# Altium PCB PCB1.PcbDoc
Units mil, origin at the board's own origin, x right, y up, seen from the top; angles counter-clockwise.
Board outline 2259.84 x 3259.84 mil, 2 copper layers (Top Layer, Bottom Layer); 14 components, 12 nets, 46 pads, 25 vias.
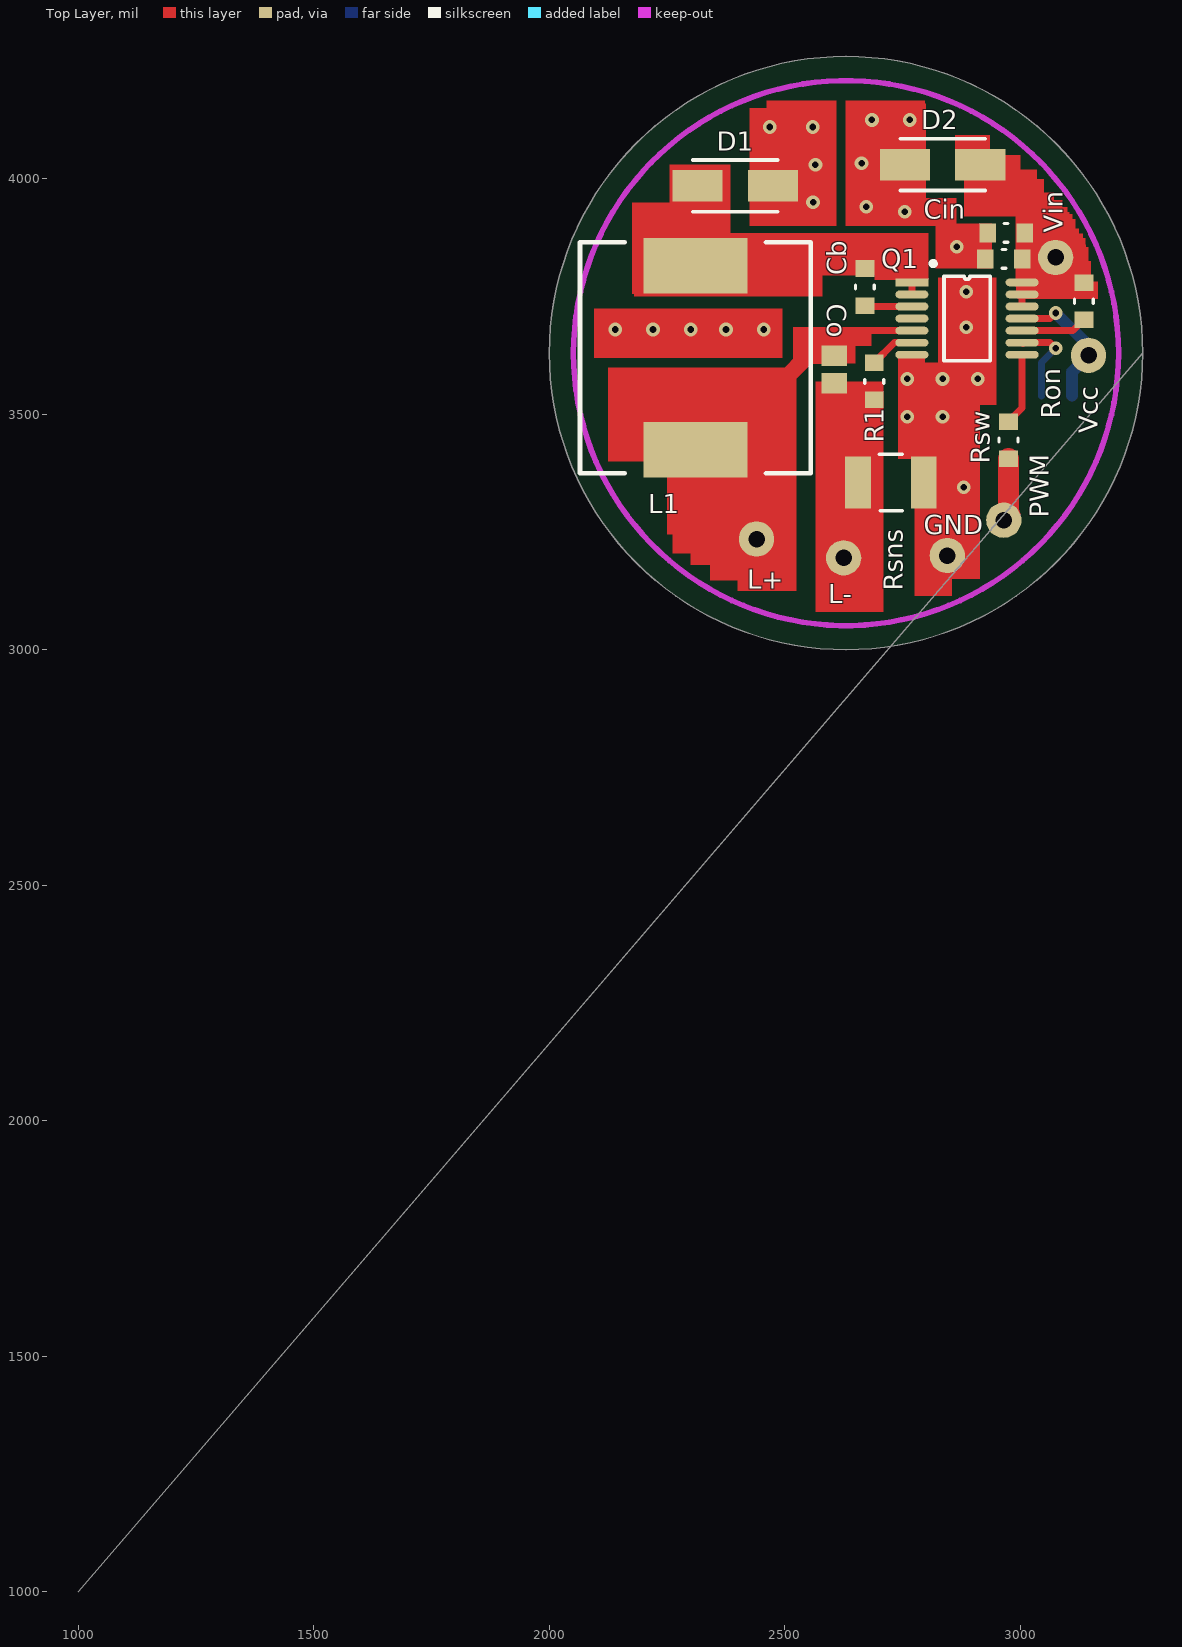
[diagram p0: Top Layer view]
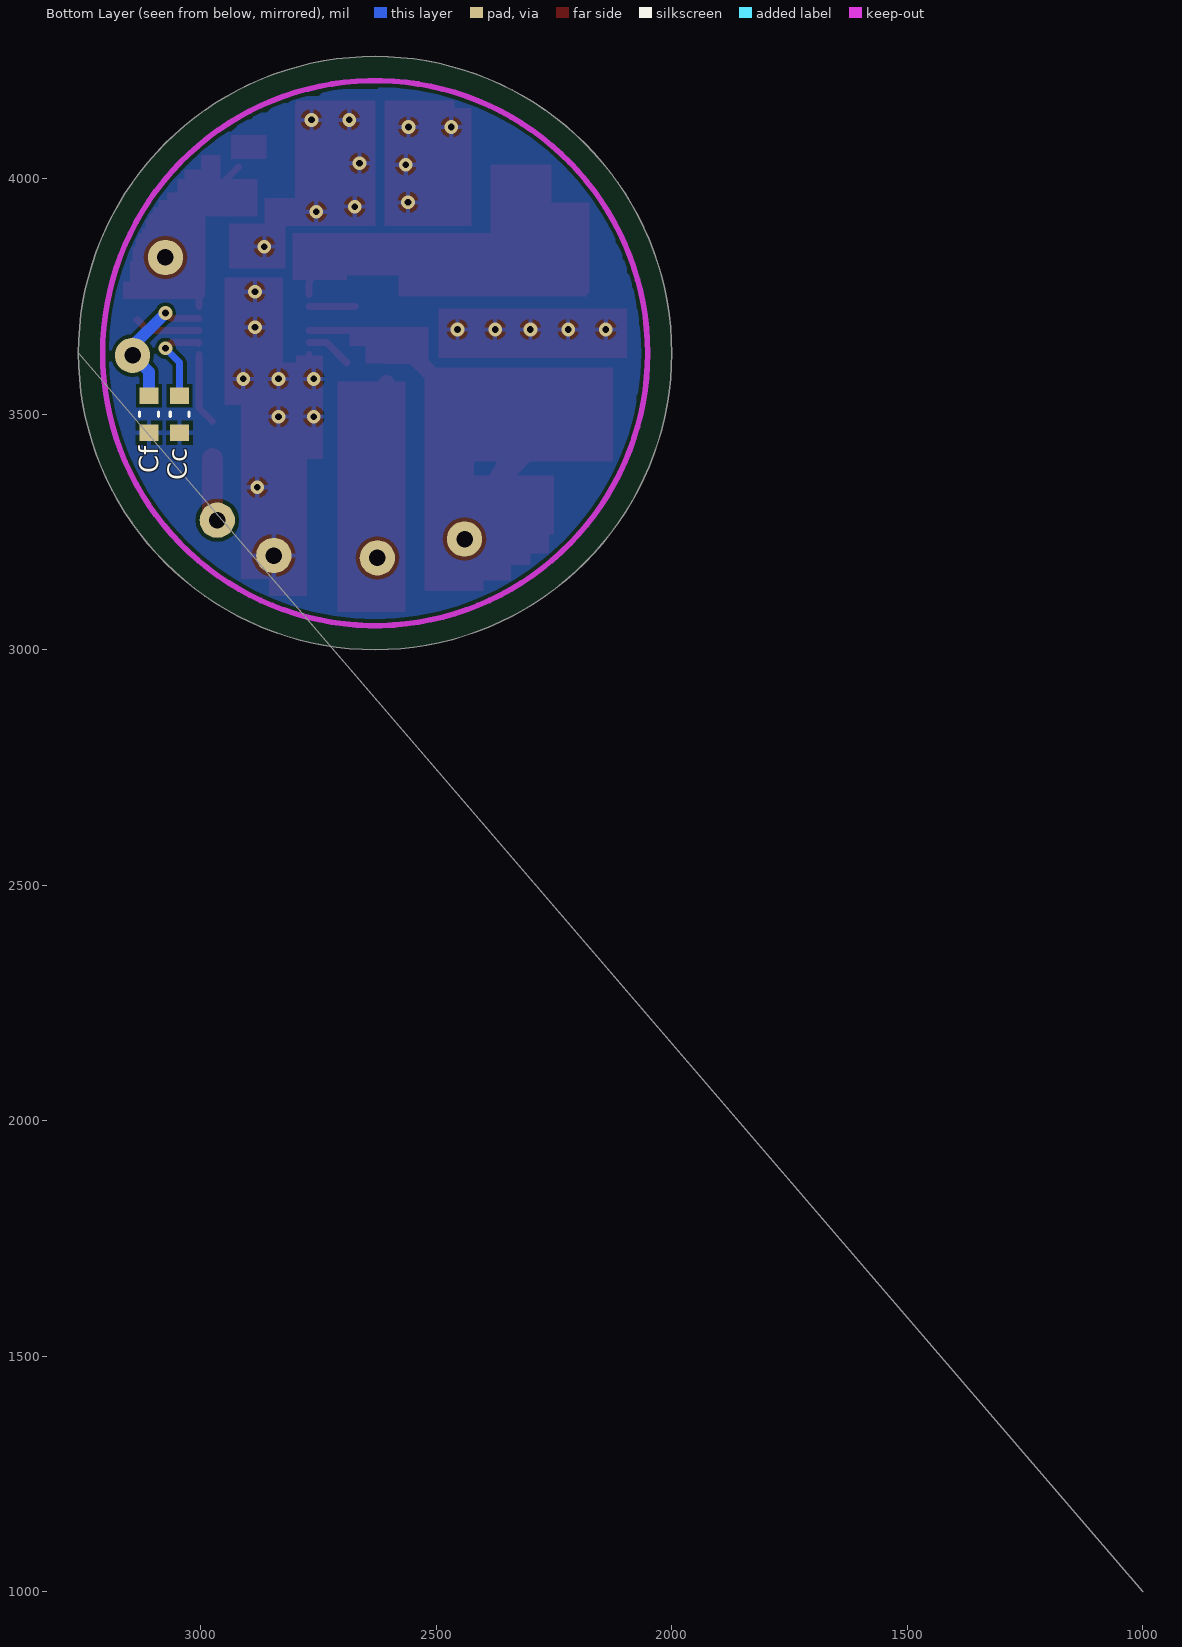
[diagram p1: Bottom Layer view, seen from below]

## Layer stack, top to bottom
Top Layer: signal copper 1.4
Dielectric: core 12.6, FR-4, Dk 4.8
Bottom Layer: signal copper 1.4

## Board outline
3259.84,3629.92 ccw(c2629.92,3629.92) 2629.92,4259.84 ccw(c2629.92,3629.92) 2000,3629.92 ccw(c2629.92,3629.92) 2629.92,3000 ccw(c2629.92,3629.92) 1000,1000

## Design rules (kind name [scope] priority, off if disabled: settings)
Clearance [All] p1: gap=8
MinimumSolderMaskSliver [All] p1: minsoldermaskwidth=4
PolygonConnect [All] p1: connectstyle=Relief reliefconductorwidth=10 reliefentries=4 polygonreliefangle="90 Angle"
RoutingVias [All] p1: holewidth=29 width=39.37 viastyle="Through Hole" minholewidth=12 minwidth=20 maxholewidth=30 maxwidth=50
SilkscreenOverComponentPads [All] p1: minsilkscreentomaskgap=10
SolderMaskExpansion [All] p1: expansion=3
Width [All] p1: maxlimit=100 minlimit=10 preferedwidth=10
26 further rules are at their usual default settings.

## Components (designator, comment, footprint, x,y, rotation, side; value= is the part's Value field where it differs from the comment)
Cb "0603" 0603 2670,3770 r90 top
Cc "0603" 0603 3045,3500 r90 bottom
Cf "0603" 0603 3110,3500 r90 bottom
Cin "0603" 0603 2965,3830 r0 top
Cin2 "0603" 0603 2970,3885 r0 top
Co "0805" C0805 2605,3595 r270 top
D1 "B1100" Diode-B1100-SMA 2395,3985 r180 top
D2 "B1100" Diode-B1100-SMA 2835,4030 r0 top
L1 "SRR1280" SRR1280-inductor 2310,3620 r180 top
Q1 "LM3406" TSSOP-14 2770,3780 r0 top
R1 "0603" 0603 2690,3570 r90 top
Ron "0603" 0603 3135,3740 r90 top
Rsns "1210" 1210 2725,3355 r180 top
Rsw "0603" 0603 2975,3445 r90 top

## Footprints (in the part's own frame and the unit in brackets; to place one, negate y for a bottom-side part, rotate by r counter-clockwise, add the part's x,y. Pads: shape width x height; smd on the part's side, far side on the other; paste and mask are expansions set on the pad)
0603 [mm]
  rect 0.9x1.02 smd: 1(-1,0) 2(1,0)
  silkscreen extent -0.1,-0.51 0.1,0.51, body extent -0.89,-0.46 0.89,0.46, height 0.9
1210 [mm]
  rect 1.4x2.8 smd: 1(-1.778,0) 2(1.778,0)
  silkscreen extent -0.64,-1.52 0.64,1.52, body extent -1.6,-1.24 1.6,1.24, height 1.3
C0805 [mm] "Chip Capacitor, Body 2.0x1.3mm, IPC High Density"
  rect 1.1x1.4 smd: 1(-0.75,0) 2(0.75,0)
  body extent -1.1,-0.72 1.1,0.72, height 1.4
Diode-B1100-SMA [mm] "100V, 1A, Schottky Package"
  rect 2.7x1.7 smd: 1(-2.032,0) 2(2.032,0)
  silkscreen extent -2.29,-1.4 2.29,1.4, body extent -2.29,-1.4 2.29,1.4, height 2.01
SRR1280-inductor [mm] "surface-mount inductor"
  rect 5.6x3 smd: 1(0,4.953) 2(0,-4.953)
  silkscreen extent -6.22,-6.22 6.22,6.22, body extent -6.22,-6.22 6.22,6.22, height 7.5
TSSOP-14 [mm] "TSSOP - 14 pin, thermal pad"
  rect 1.78x0.42 smd mask+0.05: 1(0,0)
  oval 1.78x0.42 smd mask+0.05: 2(0,-0.65) 3(0,-1.3) 4(0,-1.95) 5(0,-2.6) 6(0,-3.25) 7(0,-3.9) 8(5.94,-3.9) 9(5.94,-3.25) 10(5.94,-2.6) 11(5.94,-1.95) 12(5.94,-1.3) 13(5.94,-0.65) 14(5.94,0)
  silkscreen extent 1.02,-4.23 4.22,1.14, body extent 0.64,-4.44 5.21,0.51, height 1.1

## Part data
Cb Cc Cf Cin Cin2: library part Capacitor, "0603 capacitor"
Co: library part "Cap Pol3", "Polarized Capacitor (Surface Mount)"
D1 D2: library part "Diode - B1100"
L1: library part "Inductor - SRR1280"
Q1: "1.5A - LED Driver"
R1 Ron Rsw: library part Resistor, "0603 resistor"
Rsns: library part Resistor_1210, "1210 resistor"

## Free pads (board coordinates)
  round 75 hole 35: 0(2440,3235) 1(2625,3195) 1(2845,3200) 1(2965,3275) 1(3075,3833) 1(3145,3625)

## Via types
v1: diameter 29, hole 14, Top Layer to Bottom Layer, 25 vias

## Nets (pads, with @x,y where several pads share a name; then routed paths per layer and width w, separated by ;. In a path a pad name is that pad's centre, name@x,y a point inside that pad or via, vN(x,y) a via of type N, cw(c..) or ccw(c..) an arc to the next point about the centre after c; other vN are vias at no path point)
GND: Cc.1 Cf.1 Cin2.1 Cin.1 D1.1 D2.1 pad.1@2845,3200 Q1.7 Rsns.1 | length 31.5
  Top Layer w15: 2770,3595 Q1.7
  other v1: 2880,3345 2760,3495 2835,3495 2760,3575 2835,3575 2910,3575 2140,3680 2220,3680 2300,3680 2375,3680 2455,3680 2885,3685 2885,3760 2865,3856 2755,3930 2673,3941 2560,3950 2565,4030 2663,4033 2468,4110 2559,4110 2685,4125 2765,4125
LED+: Co.1 L1.1 pad.0 Q1.5 | length 851.8
  Top Layer w10: L1.1 2445,3425 2500,3480 2500,3575
  Top Layer w15: Co.1 2658.11,3677.64 Q1.5
  Top Layer w35: 2500,3575 2549.53,3624.53 Co.1
  Top Layer w50: L1.1 2350,3385 pad.0
LED-: Co.2 pad.1@2625,3195 R1.1 Rsns.2 | length 503
  Top Layer w35: Rsns.2 2605,3405 Co.2 2639.84,3530.63 R1.1
  Top Layer w50: pad.1@2625,3195 2625,3325 Rsns.2
NetCb_1: Cb.1 Q1.3 | length 98.2
  Top Layer w15: Cb.1@2671.81,3728.82 Q1.3
NetCb_2: Cb.2 D1.2 L1.2 Q1.1 Q1.2 | length 655.1
  Top Layer w10: D1.2@2310,3970 L1.2 2315.63,3809.37 Cb.2 2740.63,3809.37 Q1.1
  Top Layer w15: Q1.2 Q1.1
NetCc_2: Cc.2 Q1.9 | length 191.8
  Top Layer w15: Q1.9@3005.68,3650.22 Q1.9 3062.95,3652.05 v1(3075,3640)
  Bottom Layer w15: Cc.2 3045,3610 v1(3075,3640)
NetQ1_6: Q1.6 R1.2 | length 97.7
  Top Layer w15: R1.2 2732.68,3652.05 Q1.6
NetQ1_8: Q1.8 Rsw.2 | length 154
  Top Layer w15: Rsw.2 3003.86,3513.23 Q1.8
NetQ1_10: Q1.10 Ron.1 | length 140.7
  Top Layer w15: Q1.10 3112.01,3677.64 Ron.1
P_OFF_ON: pad.1@2965,3275 Rsw.1 | length 134.8
  Top Layer w45: pad.1@2975,3285 Rsw.1
  Top Layer w50: pad.1@2965,3275 pad.1@2975,3285
VCC: Cf.2 pad.1@3145,3625 Q1.11 | length 295.1
  Top Layer w15: Q1.11 3063.23,3703.23 v1(3075,3715)
  Bottom Layer w15: pad.1@3145,3625 pad.1@3145,3645
  Bottom Layer w25: v1(3075,3715) pad.1@3145,3645 ; Cf.2 3110,3590 pad.1@3145,3625
VIN: Cin2.2 Cin.2 D2.2 pad.1@3075,3833 Q1.12 Q1.13 Q1.14 Ron.2 | length 330.6
  Top Layer w15: D2.2@2920,4025 3004.37,3940.63 ; Q1.12 Q1.13
  Top Layer w25: Q1.13 Q1.14 Cin2.2@3003.86,3869.49 ; Cin2.2@3004.37,3870 3004.37,3940.63
pads on no net: Q1.4

## Polygon pours and split planes (outlines as drawn)
GND on Bottom Layer "Top Layer-No Net" (solid, pour order 20): 427 vertices, not listed, extent 2065,3060 3200,4195

## Keep-outs
Keep-Out Layer:
  circle w11.81: c2629.92,3629.92 r578.74

## Other copper
Top Layer:
  rectangle net GND: 2775,3114 2855,3150
  rectangle net LED+: 2261,3204 2304,3245
  rectangle net LED+: 2341,3147 2401,3180
  rectangle net GND: 2629,4160 2798,4166
  rectangle net GND: 2461,4150 2610,4166
  rectangle net VIN: 3133,3851 3138,3874
  rectangle net VIN: 3124,3852 3133,3884
  rectangle net VIN: 3110,3891 3117,3915
  rectangle net VIN: 3105,3892 3111,3925
  rectangle net VIN: 3100,3895 3105,3930
  rectangle net VIN: 3090,3895 3100,3940
  rectangle net VIN: 3135,3825 3145,3855
  rectangle net VIN: 3125,3815 3140,3860
  rectangle net LED+: 2400,3125 2525,3180
  rectangle net LED+: 2300,3180 2525,3245
  rectangle net LED-: 2565,3080 2710,3250
  rectangle net GND: 2740,3405 2915,3520
  rectangle net VIN: 2996,3745 3165,3782
  rectangle net GND: 2740,3594 2798,3625
  rectangle net LED+: 2639,3645 2684,3674
  rectangle net LED+: 2631,3669 2663,3685
  rectangle net LED+: 2517,3608 2650,3685
  rectangle net GND: 2793,3900 2865,3959
  rectangle net VIN: 2861,4042 2936,4093
  rectangle net VIN: 3048,3950 3072,3971
  rectangle net VIN: 3000,3990 3035,4020
  rectangle net VIN: 2958,3953 3000,4051
  rectangle net GND: 2775,3150 2915,3520
  rectangle net VIN: 2990,3870 3090,3955
  rectangle net VIN: 2990,3770 3150,3825
  rectangle net VIN: 2990,3785 3125,3895
  rectangle net GND: 2740,3520 2950,3610
  rectangle net GND: 2825,3605 2950,3790
  rectangle net VIN: 2880,3920 3050,4000
  rectangle net LED+: 2420,3245 2525,3400
  rectangle net LED+: 2250,3245 2420,3370
  rectangle net LED-: 2565,3250 2710,3305
  rectangle net LED-: 2565,3305 2710,3570
  rectangle net LED+: 2125,3400 2525,3450
  rectangle net LED+: 2125,3450 2525,3599.76
  rectangle net GND: 2095,3620 2495,3725
  rectangle net GND: 2820,3810 2940,3905
  rectangle net GND: 2575,3900 2610,4150
  rectangle net GND: 2629,3900 2800,4160
  rectangle net NetCb_2: 2690,3785 2805,3885
  rectangle net NetCb_2: 2255,3755 2385,4015
  rectangle net NetCb_2: 2175,3755 2255,3925
  rectangle net NetCb_2: 2180,3750 2580,3870
  rectangle net NetCb_2: 2375,3795 2700,3885
  rectangle net NetCb_2: 2255,4015 2385,4030
  rectangle net NetCb_2: 2175,3925 2215,3950
  rectangle net NetCb_2: 2215,3925 2255,3950
  rectangle net GND: 2425,3900 2575,4150

## Silkscreen, mask and mechanical layers (free items; w line width, h text height)
Top Overlay:
  text "Vin" at 3090,3885 h40 r90
  text "Vcc" at 3165,3460 h40 r90
  text "PWM" at 3060,3280 h40 r90
  text "GND" at 2795,3245 h40
  text "L+" at 2420,3130 h40
  text "L-" at 2592,3099 h40
Top Solder:
  rectangle: 2840,3615 2935,3785
Drill Drawing:
  text ".LEGEND" at 1320.47,2065 h60
  text "Drill Drawing." at 1320.47,1965 h60

## Dimensions
3208.66,3629.92 to 2051.18,3629.92 on Mechanical 1